# Altium PCB BMI088 I2C Breakout V1.0 PCB.PcbDoc
Units mm, origin at the board's own origin, x right, y up, seen from the top; angles counter-clockwise.
Board outline 10.78 x 13.65 mm, 2 copper layers (Top Layer, Bottom Layer); 9 components, 10 nets, 36 pads, 4 vias.
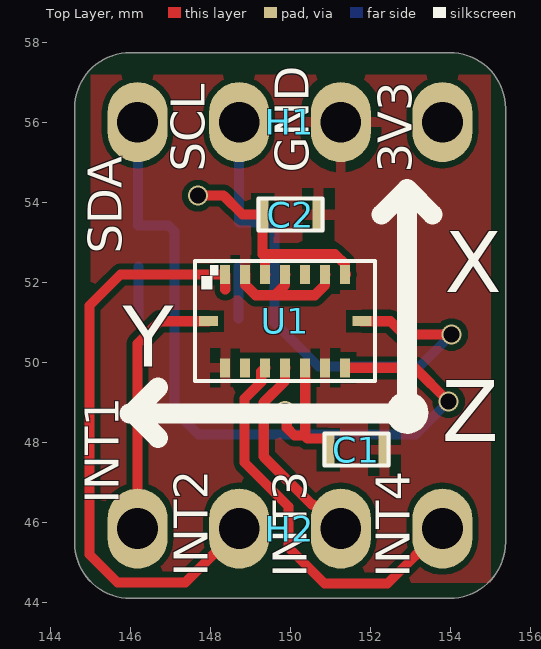
[diagram p0: Top Layer view]
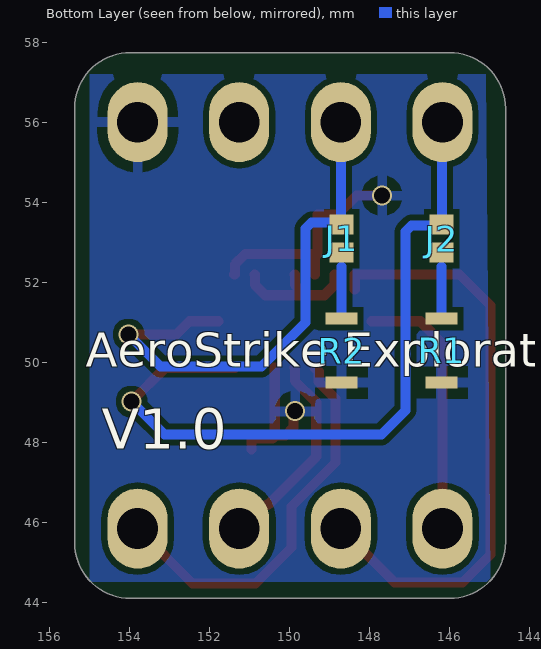
[diagram p1: Bottom Layer view, seen from below]
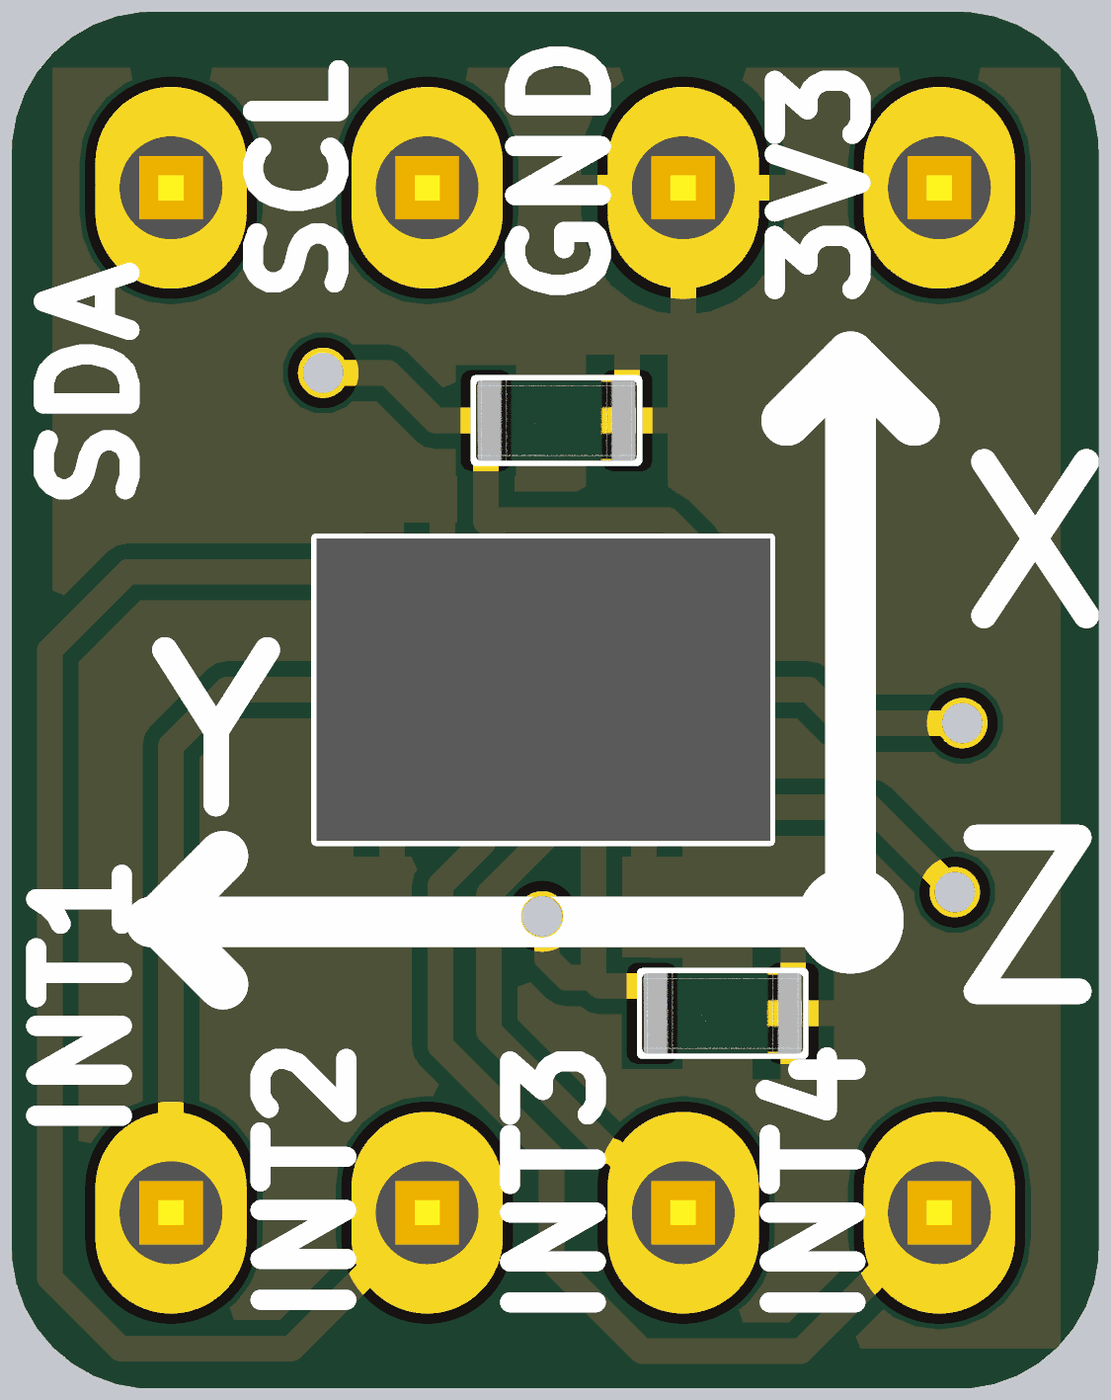
[diagram p2: 3D render of the assembled board from above, using the file's embedded part models]

## Layer stack, top to bottom
Top Solder: solder mask 0.0102, Solder Resist, Dk 3.5
Top Layer: signal copper 0.0356
Dielectric 1: dielectric 0.32, FR-4, Dk 4.8
Bottom Layer: signal copper 0.0356
Bottom Solder: solder mask 0.0102, Solder Resist, Dk 3.5

## Board outline
144.6,45.504 ccw(c146,45.504) 146,44.104 153.975,44.104 ccw(c153.975,45.504) 155.375,45.504 155.375,56.35 ccw(c153.975,56.35) 153.975,57.75 146,57.75 ccw(c146,56.35) 144.6,56.35

## Design rules (kind name [scope] priority, off if disabled: settings)
Clearance [All] p1: gap=0.15 ignorepadtopadclearanceinfootprint=FALSE
HoleSize [All] p1: absolutevalues=TRUE maxlimit=6.25 minlimit=0.35 maxpercent=80.000 minpercent=20.000
PolygonConnect [All] p1: connectstyle=Relief reliefconductorwidth=0.254 reliefentries=4 polygonreliefangle="90 Angle" airgapwidth=0.254
RoutingVias [All] p1: holewidth=4 width=1.27 viastyle="Through Hole" minholewidth=0.35 minwidth=1.27 maxholewidth=6.25 maxwidth=1.27
SolderMaskExpansion [All] p1: expansion=0.102 istentingtop=FALSE
Width [All] p1: maxlimit=0.254 minlimit=0.254 preferedwidth=0.254
29 further rules are at their usual default settings.

## Components (designator, comment, footprint, x,y, rotation, side; value= is the part's Value field where it differs from the comment)
C1 "0.1uF" "CL10B104KB8NNWC 0.1uF 0603-Footprint-1" 151.648,47.823 r180 top
C2 "0.1uF" "CL10B104KB8NNWC 0.1uF 0603-Footprint-1" 150,53.7 r180 top
H1 "PR20204VBNN 4 Pin Male Header Pin 2.54mm" "PR20204VBNN 4 Pin Male Header Pin 2.54mm-Footprint-1" 149.987,56.007 r180 top
H2 "PR20204VBNN 4 Pin Male Header Pin 2.54mm" "PR20204VBNN 4 Pin Male Header Pin 2.54mm-Footprint-1" 149.987,45.847 r0 top
J1 "Small Jumper" "Small Jumper-Footprint-1" 148.7,53.1 r270 bottom
J2 "Small Jumper" "Small Jumper-Footprint-1" 146.2,53.1 r270 bottom
R1 "WR06X152 JTL 1.5K Ohm 0603" "WR06X152 JTL 1.5K Ohm 0603-Footprint-1" 146.2,50.3 r90 bottom value="1.5K Ohm"
R2 "WR06X152 JTL 1.5K Ohm 0603" "WR06X152 JTL 1.5K Ohm 0603-Footprint-1" 148.7,50.3 r90 bottom value="1.5K Ohm"
U1 "BMI088 IMU" "BMI088 IMU-Footprint-1" 149.868,51.032 r0 top

## Footprints (in the part's own frame and the unit in brackets; to place one, negate y for a bottom-side part, rotate by r counter-clockwise, add the part's x,y. Pads: shape width x height; smd on the part's side, far side on the other; paste and mask are expansions set on the pad)
"BMI088 IMU-Footprint-1" [mm]
  rect 0.25x0.475 smd mask+0.03: 1(-1.5,1.165) 2(-1,1.165) 3(-0.5,1.165) 4(0,1.165) 5(0.5,1.165) 6(1,1.165) 7(1.5,1.165) 9(1.5,-1.165) 10(1,-1.165) 11(0.5,-1.165) 12(0,-1.165) 13(-0.5,-1.165) 14(-1,-1.165) 15(-1.5,-1.165)
  rect 0.475x0.25 smd mask+0.03: 8(1.915,0) 16(-1.915,0)
  silkscreen extent -3.89,-2.92 3.68,3.3, body extent -2.25,-1.5 2.25,1.5, height 1
"CL10B104KB8NNWC 0.1uF 0603-Footprint-1" [mm]
  rect 0.3x0.8 smd: 1(-0.7,0) 2(0.7,0)
  silkscreen extent -0.8,-0.4 0.8,0.4, body extent -0.8,-0.4 0.8,0.4, height 0.9
"PR20204VBNN 4 Pin Male Header Pin 2.54mm-Footprint-1" [mm]
  oval 1.5x2 hole 1.02: 1(-3.81,0) 2(-1.27,0) 3(1.27,0) 4(3.81,0)
  body extent -5.08,-1.27 5.08,1.27, height 2.8
"Small Jumper-Footprint-1" [mm]
  rect 0.5x0.6 smd: 1(-0.35,0) 2(0.35,0)
"WR06X152 JTL 1.5K Ohm 0603-Footprint-1" [mm]
  rect 0.3x0.8 smd: 1(-0.8,0) 2(0.8,0)
  body extent -0.85,-0.44 0.85,0.44, height 0.56

## Part data
C1 C2: library part CMP-00001-6, "CL10B104KB8NNWC 0.1uF 0603 +-10% SMD", ComponentLink1Description=Supplier, ComponentLink1URL=https://www.digikey.com/en/products/detail/samsung-electro-mechanics/CL10B104KB8NNWC/3887593
H1 H2: library part CMP-00002-5, "PR20204VBNN 4 Pin Male Header Pin 2.54mm General Use", ComponentLink1Description=Supplier, ComponentLink1URL=https://www.digikey.com/en/products/detail/metz-connect-usa-inc/PR20204VBNN/12342903?s=N4IgTCBcDaIIwA4AsBOADgJzABh0gbgEYB2xIAugL5A
J1 J2: library part CMP-00004-4, "Small Jumper For Low Current And Voltage"
R1 R2: library part CMP-00003-4, "WR06X152 JTL 1.5K Ohm 0603 +-5% SMD", ComponentLink1Description=Supplier, ComponentLink1URL=https://www.digikey.com/en/products/detail/walsin-technology-corporation/WR06X152-JTL/13239040
U1: library part CMP-00000-17, "BMI088 IMU General Use", ComponentLink1Description=Supplier, ComponentLink1URL=https://theflametrench.com/shop/bmi088-standalone-sensor

## Via types
v1: diameter 0.5, hole 0.4, Top Layer to Bottom Layer, 4 vias

## Nets (pads, with @x,y where several pads share a name; then routed paths per layer and width w, separated by ;. In a path a pad name is that pad's centre, name@x,y a point inside that pad or via, vN(x,y) a via of type N, cw(c..) or ccw(c..) an arc to the next point about the centre after c; other vN are vias at no path point)
+3V3: C1.2 C2.2 H1.1 R1.1 R2.1 U1.3 U1.7 U1.11 | length 9.3
  Top Layer w0.254: v1(147.685,54.173) 148.327,54.173 148.8,53.7 C2.2 149.3,52.7 ; U1.3 149.366,52.199 149.366,52.634 149.3,52.7 ; v1(149.857,48.785) 149.904,48.738 149.904,48.369 150.098,48.176 150.352,48.176 ; U1.11 150.368,48.192 150.352,48.176 ; C1.2 150.948,48.073 150.925,48.096 150.432,48.096 150.352,48.176 ; U1.7 151.366,52.199 151.366,52.453 151.108,52.711 149.311,52.711 149.3,52.7 ; U1.7@151.374,52.197 U1.7@151.384,52.207
GND: C1.1 C2.1 H1.2 U1.2 U1.4 U1.6 U1.10 U1.15 | length 3.3
  Top Layer w0.254: U1.2 148.87,52.195 148.87,51.941 149.128,51.683 149.608,51.683 ; U1.4 149.866,52.195 149.866,51.941 149.608,51.683 ; U1.6 150.866,52.195 150.866,51.941 150.608,51.683 149.608,51.683
INT1: H2.1 U1.16 | length 6.8
  Top Layer w0.254: H2.1@146.177,45.72 146.177,50.477 146.732,51.032 U1.16
INT2: H2.2 U1.1 | length 14.9
  Top Layer w0.254: 148.37,51.825 148.37,52.195 U1.1 148.365,52.2 145.75,52.2 144.975,51.425 144.975,45.2 145.675,44.5 147.37,44.5 H2.2
INT3: H2.3 U1.12 | length 5.2
  Top Layer w0.254: U1.12 149.866,49.865 149.866,49.539 149.33,49.004 149.33,47.647 150.523,46.454 150.563,46.454 151.257,45.76 H2.3@151.257,45.72
INT4: H2.4 U1.13 | length 10
  Top Layer w0.254: U1.13 149.27,49.769 149.27,49.515 148.849,49.093 148.849,47.501 149.95,46.4 149.95,45.375 150.85,44.475 152.425,44.475 H2.4
NetJ1_2: J1.2 R2.2 | length 1.3
  Bottom Layer w0.254: R2.2 148.7,52.4
NetJ2_2: J2.2 R1.2 | length 1.3
  Bottom Layer w0.254: R1.2 146.2,52.4
SCL: H1.3 J1.1 U1.8 | length 13.7
  Top Layer w0.254: H1.3@148.717,55.757 H1.3 ; U1.8 152.501,51.032 152.833,50.7 v1(154.025,50.7)
  Bottom Layer w0.254: H1.3 148.709,55.999 148.709,53.5 149.451,53.5 149.6,53.351 149.6,51 150.7,49.9 153.225,49.9 v1(154.025,50.7)
SDA: H1.4 J2.1 U1.9 | length 18.4
  Top Layer w0.254: U1.9 153.108,49.867 v1(153.95,49.025)
  Bottom Layer w0.254: H1.4 146.189,55.995 146.189,53.425 146.951,53.425 147.1,53.276 147.1,48.8 147.7,48.2 153.125,48.2 v1(153.95,49.025)
pads on no net: U1.5 U1.14

## Polygon pours and split planes (outlines as drawn)
+3V3 on Bottom Layer "+3V3_L02_P001" (solid, pour order 1): 145.1,57.206 154.996,57.206 154.996,44.521 144.978,44.521
GND on Top Layer "GND_L01_P000" (solid, pour order 0): 145,57.2 145,44.5 155,44.5 155,57.2

## Silkscreen, mask and mechanical layers (free items; w line width, h text height)
Top Overlay:
  text "SCL" at 147.85,54.775 h0.85 r90
  text "GND" at 150.45,54.75 h0.85 r90
  text "3V3" at 153.025,54.75 h0.85 r90
  text "SDA" at 145.775,52.725 h0.85 r90
  text "INT1" at 145.7,46.475 h0.85 r90
  text "INT2" at 147.925,44.65 h0.85 r90
  text "INT3" at 150.4,44.625 h0.85 r90
  text "INT4" at 152.975,44.625 h0.85 r90
Bottom Overlay:
  text "AeroStrike Exploration Technologies" at 155.1,49.9 h0.85
  text "V1.0" at 154.7,47.85 h1
Mechanical 1:
  the board outline again, w0.1

## Text inside footprints (layer, text, board x,y; h text height)
U1: Top Overlay "X" at 153.854,51.754 h1.52; Top Overlay "Y" at 145.804,49.889 h1.52; Top Overlay "Z" at 153.779,48.029 h1.52